# Altium PCB PCB4.PcbDoc
Units mil, origin at the board's own origin, x right, y up, seen from the top; angles counter-clockwise.
Board outline 2085 x 2170 mil, 2 copper layers (Top Layer, Bottom Layer); 62 components, 42 nets, 192 pads, 44 vias.
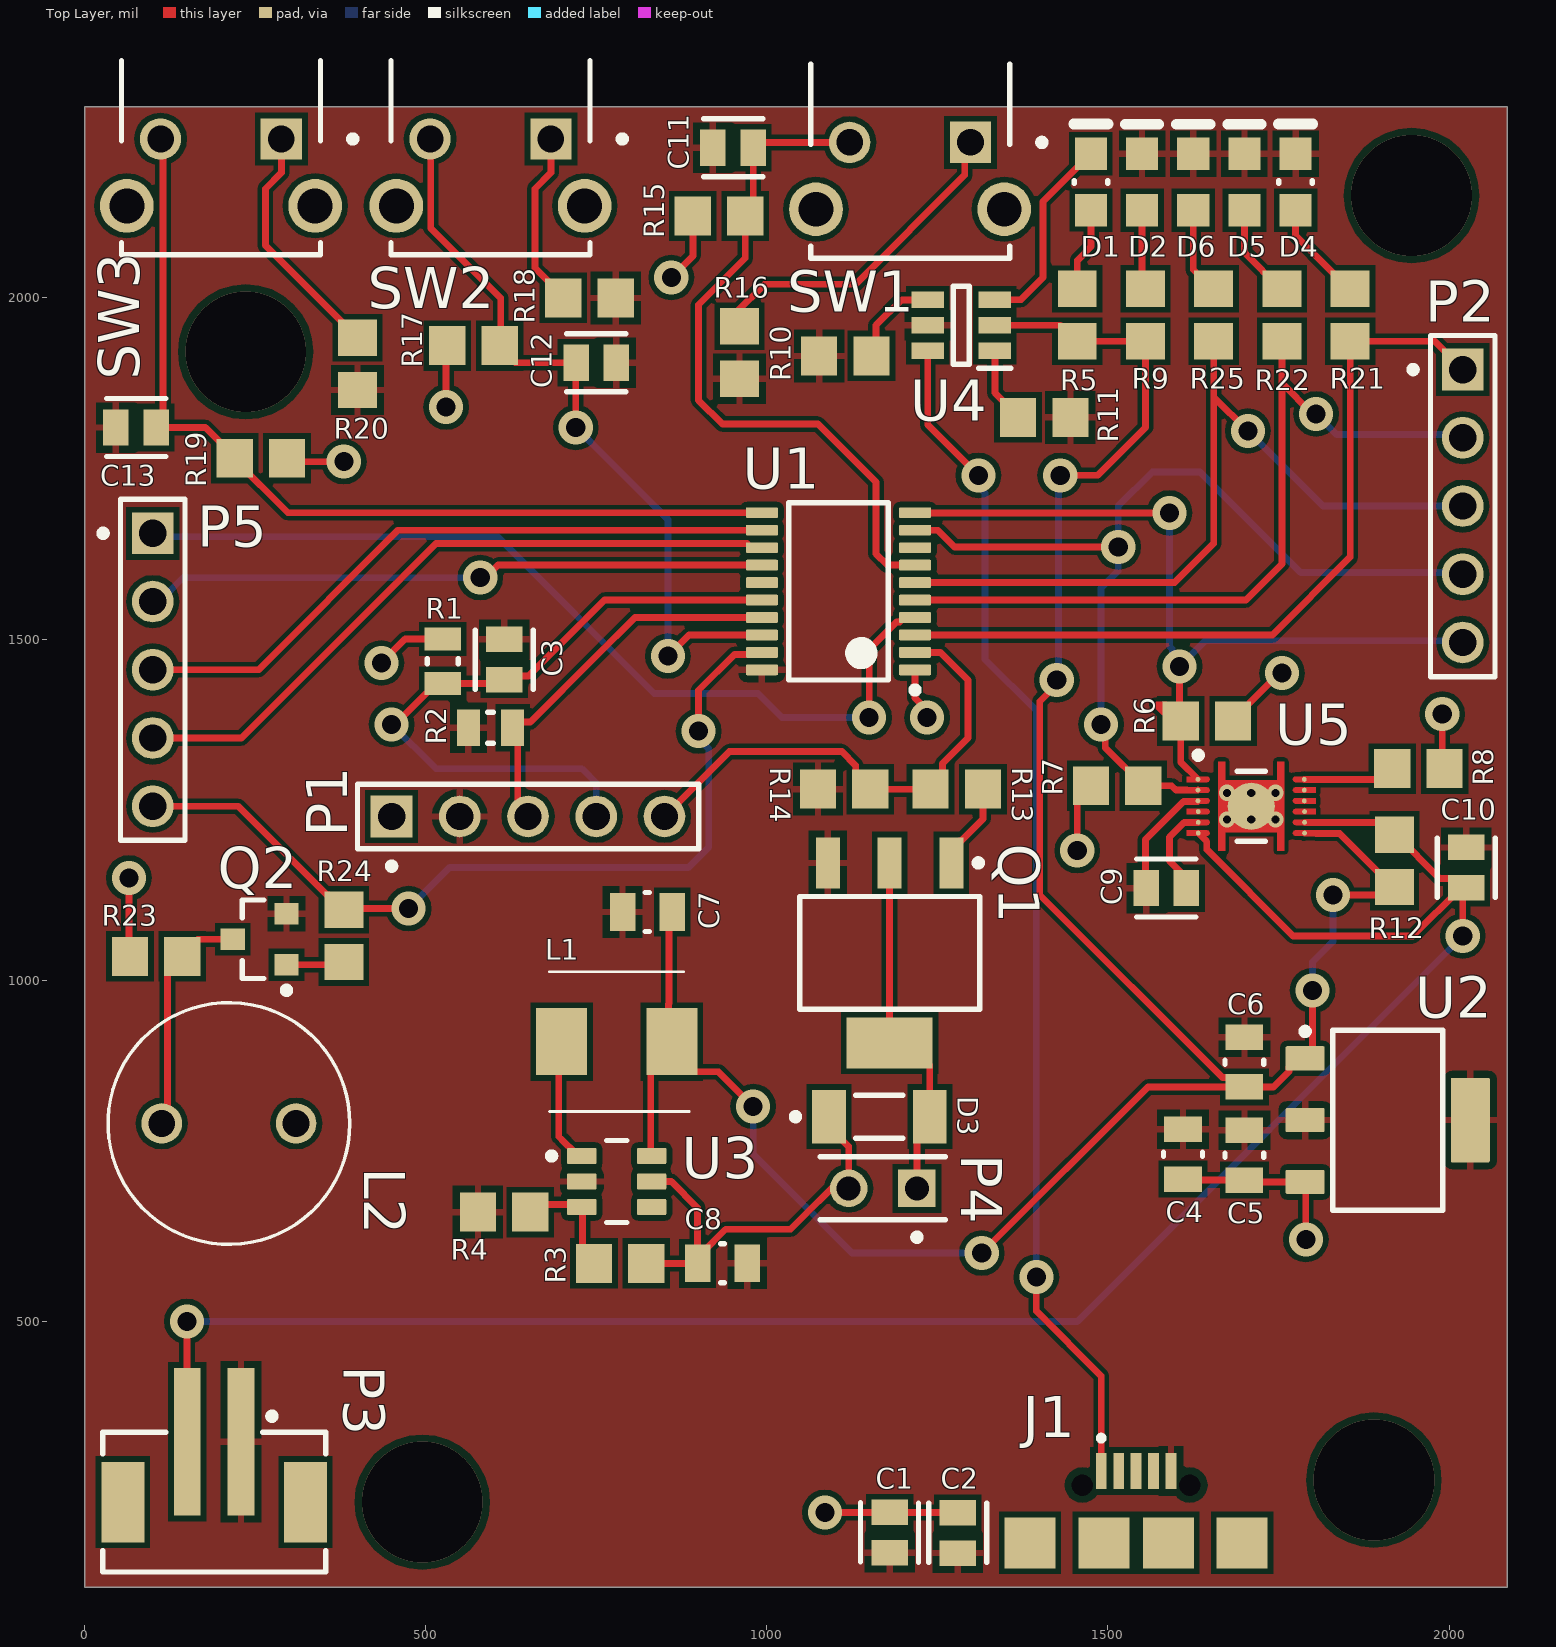
[diagram p0: Top Layer view]
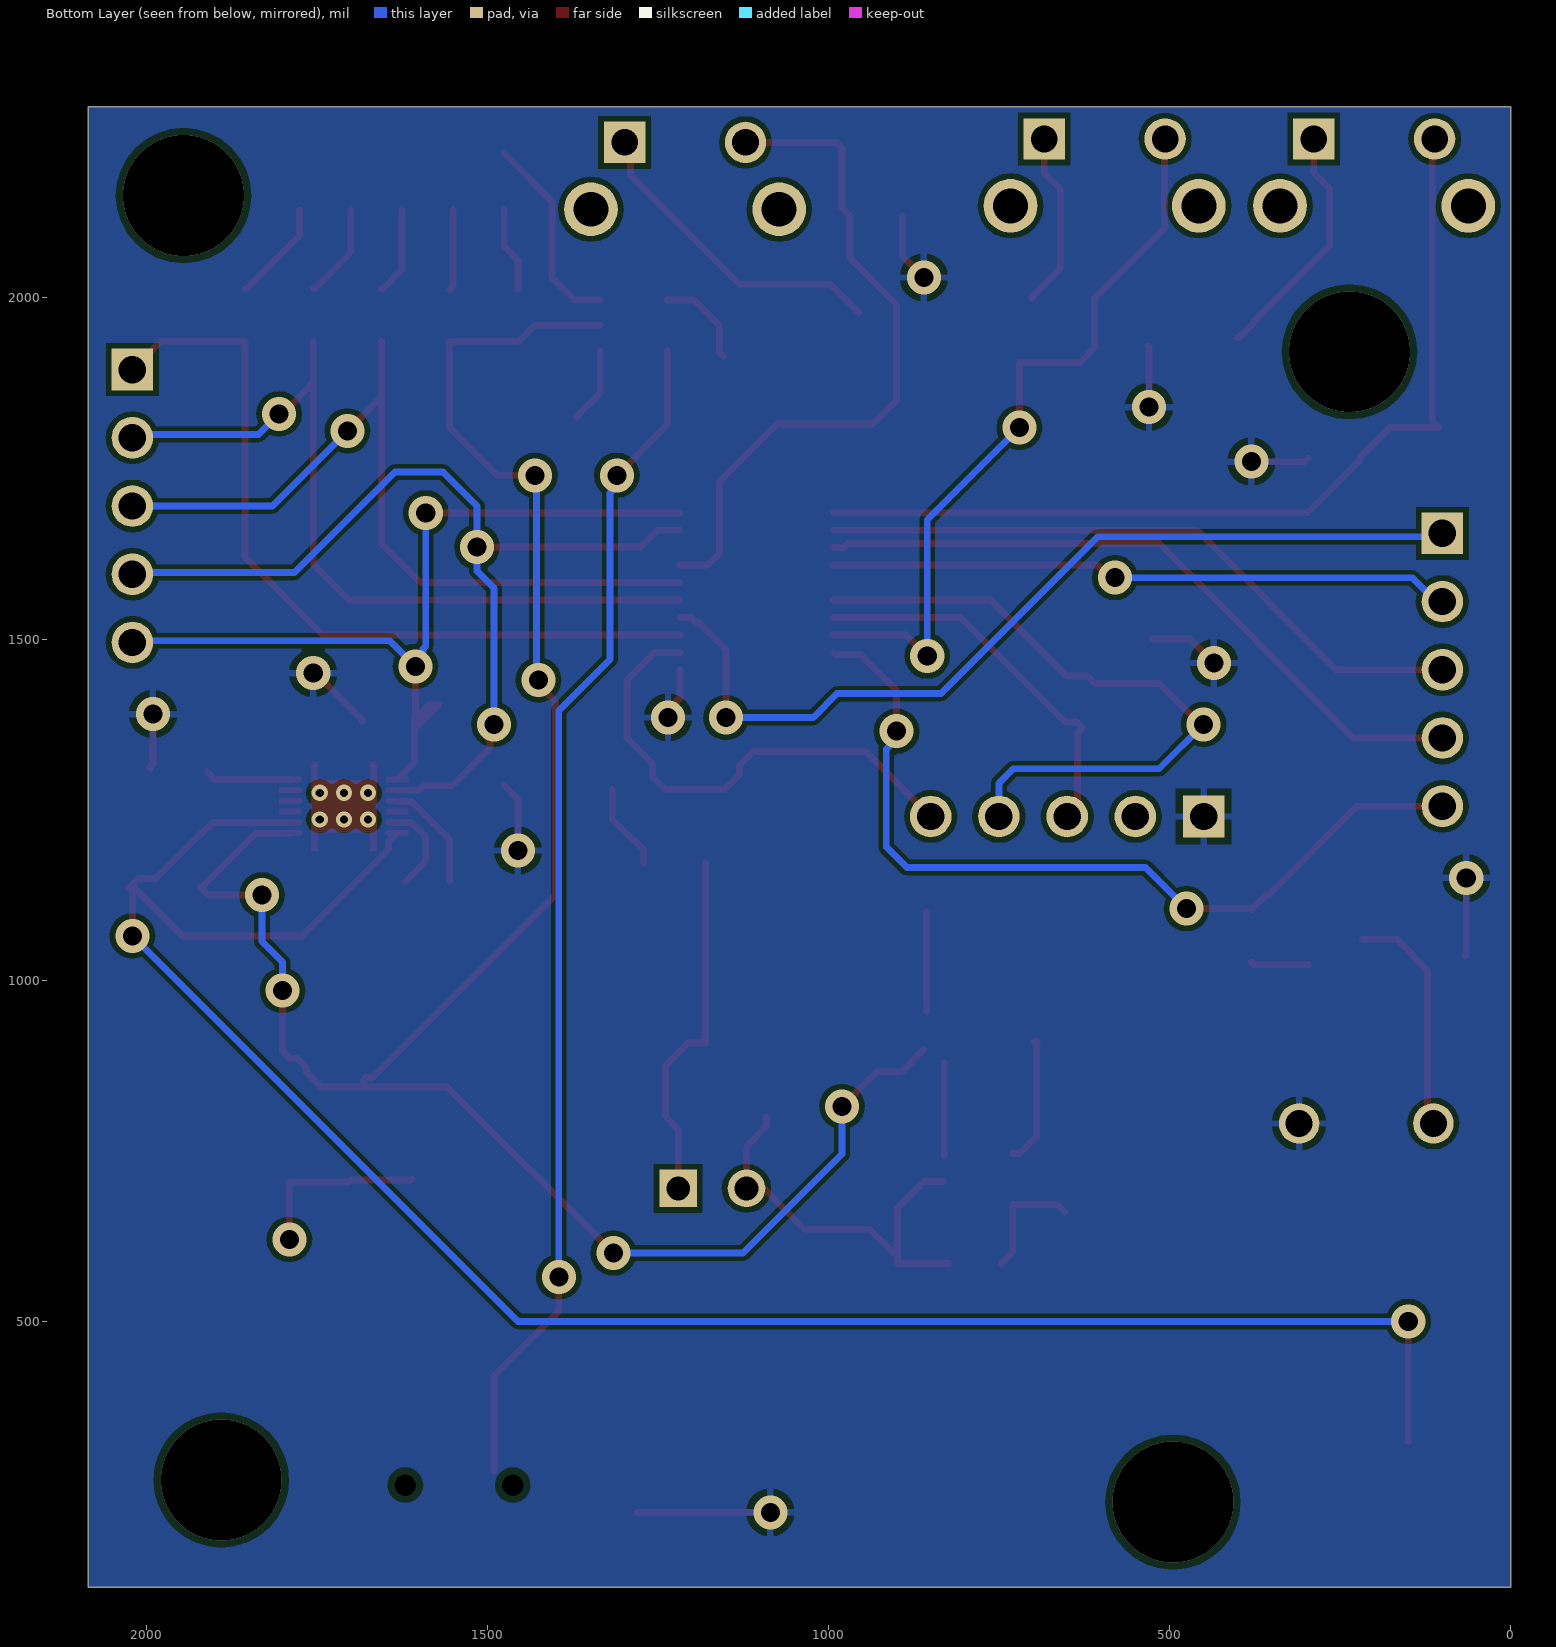
[diagram p1: Bottom Layer view, seen from below]
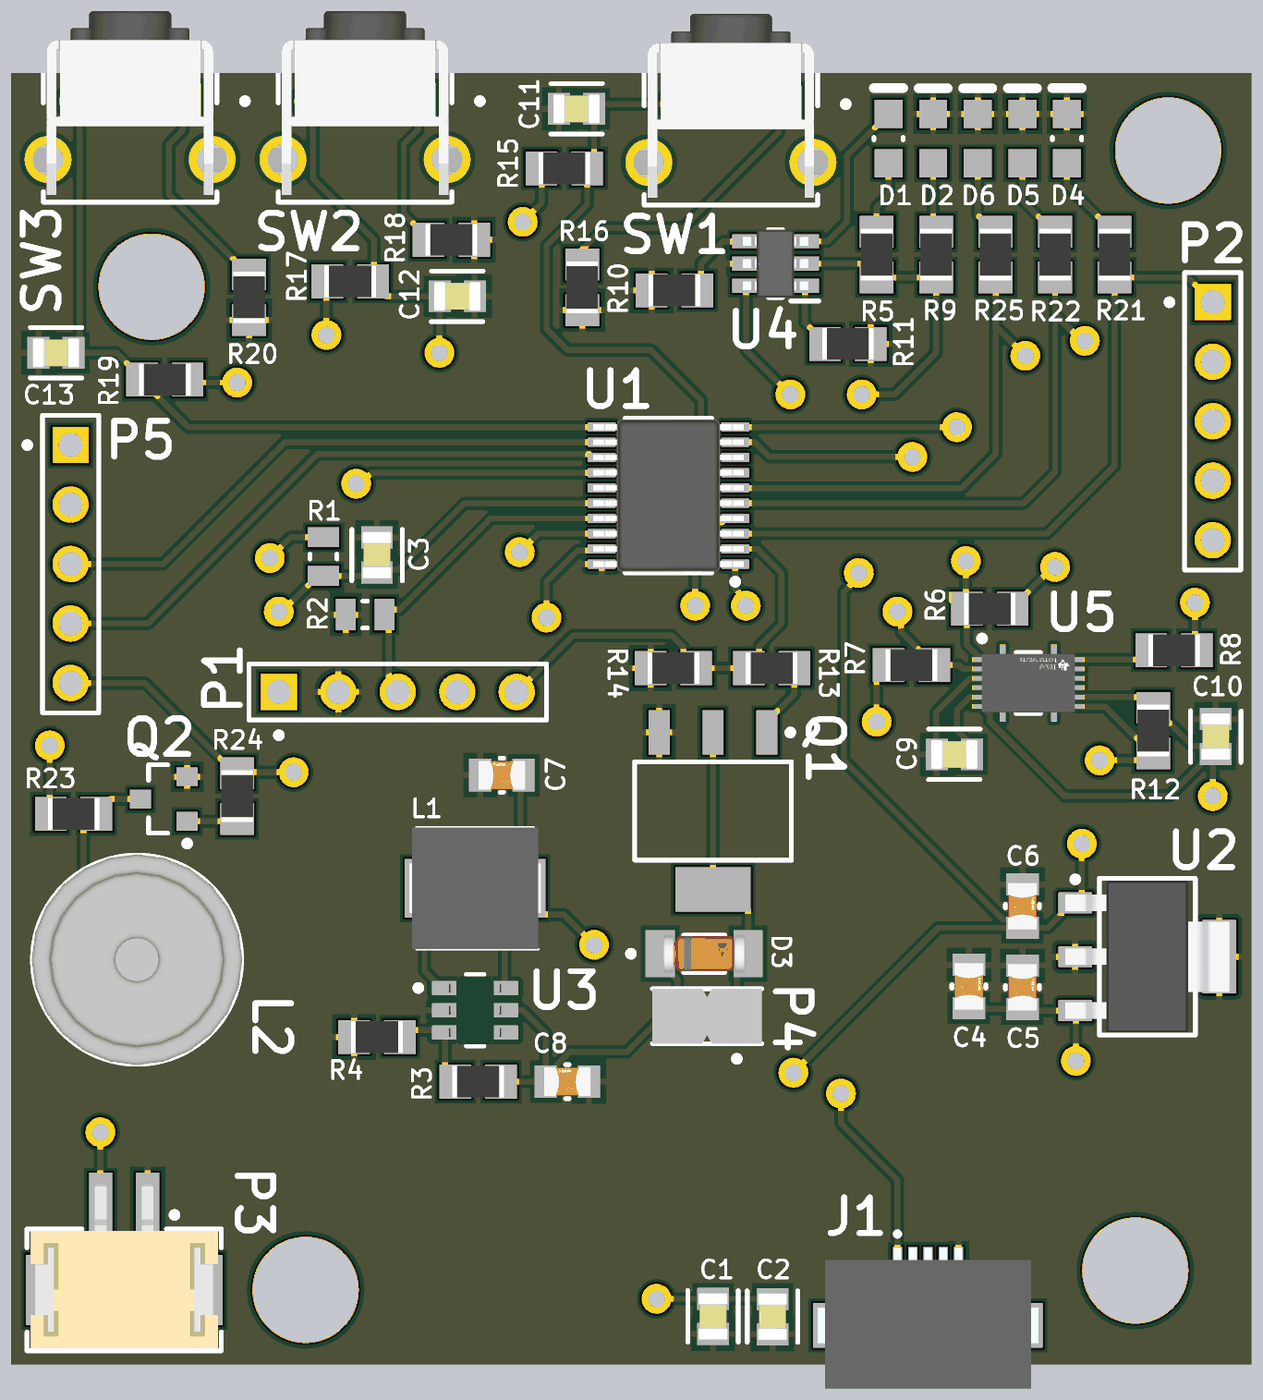
[diagram p2: 3D render of the assembled board from above, using the file's embedded part models]

## Layer stack, top to bottom
Top Solder: solder mask 0.4, Solder Resist, Dk 3.5
Top Layer: signal copper 1.4
Dielectric 1: dielectric 12.6, FR-4, Dk 4.8
Bottom Layer: signal copper 1.4
Bottom Solder: solder mask 0.4, Solder Resist, Dk 3.5

## Board outline
0,110 2085,110 2085,2280 0,2280

## Design rules (kind name [scope] priority, off if disabled: settings)
Clearance [All] p1: gap=8 ignorepadtopadclearanceinfootprint=FALSE except(6: Arc-Arc Arc-Track Arc-SMDPad Arc-THPad Arc-Fill Arc-Poly Arc-Region Track-Track Track-SMDPad Track-THPad Track-Fill Track-Poly Track-Region SMDPad-SMDPad SMDPad-THPad THPad-THPad Fill-Fill Fill-Poly Fill-Region Poly-Poly Poly-Region Region-Region; 10: Fill-Hole Poly-Hole Region-Hole)
PolygonConnect [All] p1: connectstyle=Relief reliefconductorwidth=10 reliefentries=4 polygonreliefangle="90 Angle" airgapwidth=10
RoutingVias [All] p1: holewidth=28 width=50 viastyle="Through Hole" minholewidth=28 minwidth=50 maxholewidth=28 maxwidth=50
SolderMaskExpansion [All] p1: expansion=4 istentingtop=FALSE
Width [All] p1: maxlimit=10 minlimit=10 preferedwidth=10
30 further rules are at their usual default settings.

## Classes and differential pairs
component class "Power Supply": C4 C5 C6 C7 C8 L1 R3 R4 U2
component class MotorControl: D3 P4 Q1 R13 R14
component class MCU: C1 C2 C3 C11 C12 C13 D4 D5 D6 L2 P1 P2 P5 Q2 R1 R2 R15 R16 R17 R18 R19 R20 R21 R22 R23 R24 R25 SW1 SW2 SW3 U1
component class BatteryControl: C9 C10 D1 D2 J1 P3 R5 R6 R7 R8 R9 R10 R11 R12 U4 U5

## Components (designator, comment, footprint, x,y, rotation, side; value= is the part's Value field where it differs from the comment)
C1 "10 uF" FP-C0805C-DG-MFG 1180,190.47 r270 top value=10uF
C2 "0.1 uF" FP-C0805C-DG-MFG 1280,190 r270 top value=10uF
C3 "1.1 nF" FP-C0805C-DG-MFG 615,1470 r90 top value=10uF
C4 "4.7uF" FP-CC0805-0_85-MFG 1610,745 r90 top value="100 nF"
C5 "470nF" FP-CC0805-0_85-MFG 1700,743.58 r90 top value="100 nF"
C6 "4.7uF" FP-CC0805-0_85-MFG 1700,880 r90 top value="100 nF"
C7 "1uF" FP-CC0805-0_85-MFG 825,1100 r180 top value="100 nF"
C8 "4.7uF" FP-CC0805-0_85-MFG 935,585 r180 top value="100 nF"
C9 "0.47 uF" FP-C0805C-DG-MFG 1585.47,1135 r180 top value=10uF
C10 "1 nF" FP-C0805C-DG-MFG 2025,1165 r90 top value=10uF
C11 "0.1uF" FP-C0805C-DG-MFG 950.47,2220 r180 top value=10uF
C12 "0.1uF" FP-C0805C-DG-MFG 750,1905 r0 top value=10uF
C13 "0.1uF" FP-C0805C-DG-MFG 75.47,1810 r180 top value=10uF
D1 "LTST-C170KRKT" LTST-C170KRKT_V 1475,2170 r90 top
D2 "HSMG-C170" AVAG-HSMX-C170_V 1550,2170 r90 top
D3 "LS4148-GS18" FP-6_560-5006_01-4-MFG 1165,800 r0 top value=4pF
D4 "LTST-C170KRKT" LTST-C170KRKT_V 1775,2170 r90 top
D5 "HSMG-C170" AVAG-HSMX-C170_V 1700,2170 r90 top
D6 "HSMG-C170" AVAG-HSMX-C170_V 1625,2170 r90 top
J1 "MICROQTJ" MICROQTJ 1541.26,200.94 r0 top
L1 "MWSA0503S-100MT" MWSA0503S4R7MT 780,910 r180 top
L2 "GMD0942YB" CPE-171-Footprint-1 211.61,790 r180 top
P1 "77311-462K05LF" FCI-77311-5_V 650,1240 r0 top
P2 "77311-462K05LF" FCI-77311-5_V 2020,1695 r270 top
P3 "620302124022" 620302124022 190,235 r0 top
P4 "5-146280-2" TECO-5-146280-2_V 1170,695 r180 top
P5 "77311-462K05LF" FCI-77311-5_V 100,1455 r270 top
Q1 "BSP296N" INF-PG-SOT223_SC-73_M 1180,1040 r270 top
Q2 "MMBTA06LT1G" ONSC-SOT-23-3-318-08_V 256.61,1060 r180 top
R1 "47k" RESC2013X50X30LL20T20 525,1467.48 r90 top
R2 "1k" RESC2013X50X30LL20T20 595,1370 r0 top
R3 "Resistor 1k +/-1% 0805 125 mW" RESC2013X70X40ML20T20 785,585 r0 top value=1M
R4 "Resistor 1k +/-1% 0805 125 mW" RESC2013X70X40ML20T20 615,660 r0 top value=71.5k
R5 "Resistor 1k +/-1% 0805 125 mW" RESC2013X70X40ML20T20 1455,1975 r270 top value=470
R6 "Resistor 1k +/-1% 0805 125 mW" RESC2013X70X40ML20T20 1645,1380 r0 top value=4.7k
R7 "Resistor 1k +/-1% 0805 125 mW" RESC2013X70X40ML20T20 1513.39,1285 r180 top value=4.7k
R8 "Resistor 1k +/-1% 0805 125 mW" RESC2013X70X40ML20T20 1955,1310 r0 top value=10k
R9 "Resistor 1k +/-1% 0805 125 mW" RESC2013X70X40ML20T20 1555,1975 r270 top value=470
R10 "Resistor 1k +/-1% 0805 125 mW" RESC2013X70X40ML20T20 1115,1915 r180 top value=10k
R11 "Resistor 1k +/-1% 0805 125 mW" RESC2013X70X40ML20T20 1406.61,1825 r0 top value=10k
R12 "Resistor 1k +/-1% 0805 125 mW" RESC2013X70X40ML20T20 1920,1175 r270 top value=0.01
R13 "Resistor 1k +/-1% 0805 125 mW" RESC2013X70X40ML20T20 1278.39,1280 r180 top value=220
R14 "Resistor 1k +/-1% 0805 125 mW" RESC2013X70X40ML20T20 1113.39,1280 r0 top value=10k
R15 "Resistor 1k +/-1% 0805 125 mW" RESC2013X70X40ML20T20 930,2120 r0 top value=10k
R16 "Resistor 1k +/-1% 0805 125 mW" RESC2013X70X40ML20T20 960,1920 r270 top value=1k
R17 "Resistor 1k +/-1% 0805 125 mW" RESC2013X70X40ML20T20 570,1930 r0 top value=10k
R18 "Resistor 1k +/-1% 0805 125 mW" RESC2013X70X40ML20T20 740,2000 r0 top value=1k
R19 "Resistor 1k +/-1% 0805 125 mW" RESC2013X70X40ML20T20 258.39,1765 r180 top value=10k
R20 "Resistor 1k +/-1% 0805 125 mW" RESC2013X70X40ML20T20 400,1903.39 r270 top value=1k
R21 "Resistor 1k +/-1% 0805 125 mW" RESC2013X70X40ML20T20 1855,1975 r270 top value=470
R22 "Resistor 1k +/-1% 0805 125 mW" RESC2013X70X40ML20T20 1755,1975 r270 top value=470
R23 "Resistor 1k +/-1% 0805 125 mW" RESC2013X70X40ML20T20 105,1035 r0 top value=1k
R24 "Resistor 1k +/-1% 0805 125 mW" RESC2013X70X40ML20T20 380,1065 r270 top value=1k
R25 "Resistor 1k +/-1% 0805 125 mW" RESC2013X70X40ML20T20 1655,1975 r270 top value=470
SW1 "1825027-5" FP-1825027-5-0 1210,2225 r180 top
SW2 "1825027-5" FP-1825027-5-0 595,2230 r180 top
SW3 "1825027-5" FP-1825027-5-0 200,2230 r180 top
U1 "MSP430G2553IPW20" PW0020A_L 1105,1570 r180 top
U2 "LM340MP-5.0/NOPB" DCY0004A_L 1910,795 r0 top
U3 "TLV61046ADBVT" FP-DBV0006A-MFG 780,705 r0 top
U4 "BQ21040DBVT" SOT95P280X145-6N 1285,1960 r180 top
U5 "BQ27441DRZR-G1A" FP-DRZ0012A-MFG 1710,1255 r270 top

## Footprints (in the part's own frame and the unit in brackets; to place one, negate y for a bottom-side part, rotate by r counter-clockwise, add the part's x,y. Pads: shape width x height; smd on the part's side, far side on the other; paste and mask are expansions set on the pad)
620302124022 [mm] "2.00mm SMT Male Vertical Shrouded Header, 2p"
  rect 1x5.5 smd: 1(1,2.25) 2(-1,2.25)
  rect 1.6x3 smd: MP1(-3.4,0) MP2(3.4,0)
  silkscreen extent -4.15,-2.6 4.15,3.32, body extent -4,-2.5 4,4.51, height 6.77
AVAG-HSMX-C170_V [mm] "SMD, 2-Leads, Body 2x1.25mm, Height 0.8mm"
  rect 1.2x1.2 smd: 1(-1.05,0) 2(1.05,0)
  silkscreen extent 2.15,-0.63 2.15,0.63, body extent -1,-0.63 1,0.63, height 0.8
CPE-171-Footprint-1 [mm]
  round 1.508 hole 1: 1(-2.5,0) 2(2.5,0)
  silkscreen extent -4.5,-4.5 4.5,4.5, body extent -4.5,-4.5 4.5,4.5, height 8.01
DCY0004A_L [mm] "SOT223, 4-Leads, Body 6.7x3.7mm, Pitch 2.3mm, IPC High Density"
  rrect11% 1.45x0.9 smd: 1(-3.075,2.3) 2(-3.075,0) 3(-3.075,-2.3)
  rrect7% 1.45x3.15 smd: 4(3.075,0)
  silkscreen extent -3.2,-3.35 2.05,3.42, body extent -3.5,-3.25 3.5,3.25, height 1.62
FCI-77311-5_V [mm] "THD, 5-Leads, Body 12.7x2.4mm, Pitch 2.54mm"
  rect 1.55x1.55 hole 1.02: 1(-5.08,0)
  round 1.55 hole 1.02: 2(-2.54,0) 3(0,0) 4(2.54,0) 5(5.08,0)
  silkscreen extent -6.35,-1.97 6.35,1.2, body extent -6.35,-1.2 6.35,1.2, height 16.24
FP-6_560-5006_01-4-MFG [mm]
  rect 1.25x2 smd paste+0 mask+0: 1(-1.875,0) 2(1.875,0)
  silkscreen extent -3.25,-0.8 0.87,0.8, body extent -2.6,-1.1 2.6,1.1, height 0.25
FP-1825027-5-0 [mm]
  rect 1.54x1.54 hole 0.99 paste-1000 mask+0: 1(-2.25,-0.075)
  round 1.54 hole 0.99 paste-1000 mask+0: 2(2.25,-0.075)
  round 2 hole 1.3 paste-1000 mask+0: 3(-3.505,2.415) 4(3.505,2.415)
  silkscreen extent -5.03,-3 3.7,4.23, body extent -4.6,-4.34 4.6,4.33, height 0.25
FP-C0805C-DG-MFG [mm]
  rect 0.95x1.35 smd paste+0 mask+0: 1(-0.75,0) 2(0.75,0)
  silkscreen extent -1.11,-1.08 1.1,1.07, body extent -1.4,-0.85 1.4,0.85, height 0.25
FP-CC0805-0_85-MFG [mm]
  rect 0.95x1.4 smd paste+0 mask+0: 1(-0.925,0) 2(0.925,0)
  silkscreen extent -0.08,-0.72 0.08,0.72, body extent -1.6,-1.05 1.6,1.05, height 0.25
FP-DBV0006A-MFG [mm]
  rrect17% 1.1x0.6 smd paste+0 mask+0: 1(-1.3,0.95) 2(-1.3,0) 3(-1.3,-0.95) 4(1.3,-0.95) 5(1.3,0) 6(1.3,0.95)
  silkscreen extent -2.55,-1.53 0.38,1.53, body extent -1.95,-1.78 1.95,1.78, height 0.25
FP-DRZ0012A-MFG [mm]
  round 0.18 smd paste-1000 mask+0: 1(-1,-1.985) 2(-0.6,-1.985) 3(-0.2,-1.985) 4(0.2,-1.975) 5(0.6,-1.975) 6(1,-1.975) 7(1,1.985) 8(0.6,1.985) 9(0.2,1.985) 10(-0.2,1.975) 11(-0.6,1.975) 12(-1,1.975)
  round 1.755 smd paste-1000 mask+0: 13(0,0)
  Top Layer region: -1.65,1.225 1.65,1.225 1.65,0.975 0.975,0.975 0.975,-0.975 1.65,-0.975 1.65,-1.225 -1.65,-1.225 -1.65,-0.975 -0.975,-0.975 -0.975,0.975 -1.65,0.975 -1.65,1.225
  Top Layer region: -0.9,2.4 -0.9,1.65 -0.913,1.6 -0.95,1.563 -1,1.55 -1,1.55 -1.038,1.558 -1.071,1.579 -1.092,1.612 -1.1,1.65 -1.1,1.65 -1.1,2.4
  Top Layer region: -0.5,2.4 -0.5,1.65 -0.513,1.6 -0.55,1.563 -0.6,1.55 -0.6,1.55 -0.638,1.558 -0.671,1.579 -0.692,1.612 -0.7,1.65 -0.7,1.65 -0.7,2.4
  Top Layer region: -0.1,2.4 -0.1,1.65 -0.113,1.6 -0.15,1.563 -0.2,1.55 -0.2,1.55 -0.238,1.558 -0.271,1.579 -0.292,1.612 -0.3,1.65 -0.3,1.65 -0.3,2.4
  Top Layer region: 0.3,2.4 0.3,1.65 0.287,1.6 0.25,1.563 0.2,1.55 0.2,1.55 0.162,1.558 0.129,1.579 0.108,1.612 0.1,1.65 0.1,1.65 0.1,2.4
  Top Layer region: 0.7,2.4 0.7,1.65 0.687,1.6 0.65,1.563 0.6,1.55 0.6,1.55 0.562,1.558 0.529,1.579 0.508,1.612 0.5,1.65 0.5,1.65 0.5,2.4
  Top Layer region: 1.1,2.4 1.1,1.65 1.087,1.6 1.05,1.563 1,1.55 1,1.55 0.962,1.558 0.929,1.579 0.908,1.612 0.9,1.65 0.9,1.65 0.9,2.4
  Top Layer region: 0.9,-2.4 0.9,-1.65 0.908,-1.612 0.929,-1.579 0.962,-1.558 1,-1.55 1,-1.55 1.038,-1.558 1.071,-1.579 1.092,-1.612 1.1,-1.65 1.1,-1.65 1.1,-2.4
  Top Layer region: 0.5,-2.4 0.5,-1.65 0.508,-1.612 0.529,-1.579 0.562,-1.558 0.6,-1.55 0.6,-1.55 0.638,-1.558 0.671,-1.579 0.692,-1.612 0.7,-1.65 0.7,-1.65 0.7,-2.4
  Top Layer region: 0.1,-2.4 0.1,-1.65 0.108,-1.612 0.129,-1.579 0.162,-1.558 0.2,-1.55 0.2,-1.55 0.238,-1.558 0.271,-1.579 0.292,-1.612 0.3,-1.65 0.3,-1.65 0.3,-2.4
  Top Layer region: -0.3,-2.4 -0.3,-1.65 -0.292,-1.612 -0.271,-1.579 -0.238,-1.558 -0.2,-1.55 -0.2,-1.55 -0.162,-1.558 -0.129,-1.579 -0.108,-1.612 -0.1,-1.65 -0.1,-1.65 -0.1,-2.4
  Top Layer region: -0.7,-2.4 -0.7,-1.65 -0.692,-1.612 -0.671,-1.579 -0.638,-1.558 -0.6,-1.55 -0.6,-1.55 -0.562,-1.558 -0.529,-1.579 -0.508,-1.612 -0.5,-1.65 -0.5,-1.65 -0.5,-2.4
  Top Layer region: -1.1,-2.4 -1.1,-1.65 -1.092,-1.612 -1.071,-1.579 -1.038,-1.558 -1,-1.55 -1,-1.55 -0.962,-1.558 -0.929,-1.579 -0.908,-1.612 -0.9,-1.65 -0.9,-1.65 -0.9,-2.4
  silkscreen extent -2.02,-2.1 1.3,0.53, body extent -1.75,-2.5 1.75,2.5, height 0.25
INF-PG-SOT223_SC-73_M [mm] "SOT223, 4-Leads, Body 6.5x3.5mm, Pitch 2.3mm, IPC Low Density"
  rect 1.9x0.9 smd: 1(-3.35,2.3) 2(-3.35,0) 3(-3.35,-2.3)
  rect 1.9x3.2 smd: 4(3.35,0)
  silkscreen extent -3.47,-3.35 2.1,3.43, body extent -1.85,-3.35 1.85,3.35, height 1.8
LTST-C170KRKT_V [mm] "SMD, 2-Leads, Body 2x1.25mm"
  rect 1.2x1.2 smd: 1(-1.05,0) 2(1.05,0)
  silkscreen extent -0.05,-0.63 2.16,0.64, body extent -1,-0.63 1,0.63, height 1.2
MICROQTJ [mm]
  rect 0.4x1.35 smd: 1(-1.3,2.025) 2(-0.65,2.025) 3(0,2.025) 4(0.65,2.025) 5(1.3,2.025)
  round 0.4 hole 0.8 unplated: MH1(-2,1.5) MH2(2,1.5)
  rect 1.9x1.9 smd: MP1(-3.95,-0.65) MP2(3.95,-0.65) MP3(-1.2,-0.65) MP4(1.2,-0.65)
  silkscreen extent -1.4,3.15 -1.2,3.35, body extent -4.71,-3.35 4.71,2.66, height 2.03
MWSA0503S4R7MT [mm]
  rect 1.9x2.5 smd: 1(-2.05,0) 2(2.05,0)
  silkscreen extent -2.7,-2.6 2.5,2.6, body extent -2.81,-2.6 2.81,2.6, height 3.1
ONSC-SOT-23-3-318-08_V [mm] "SOT23, 3-Leads, Body 2.92x1.3mm, Pitch 0.95mm"
  rect 0.9x0.8 smd: 1(-1,0.95) 2(-1,-0.95) 3(1,0)
  silkscreen extent -1.13,-1.46 0.65,2.02, body extent -0.65,-1.46 0.65,1.46, height 1.11
PW0020A_L [mm] "SOP, 20-Leads, Body 6.6x4.5mm, Pitch 0.65mm, IPC High Density"
  rrect25% 1.2x0.4 smd: 1(-2.85,2.925) 2(-2.85,2.275) 3(-2.85,1.625) 4(-2.85,0.975) 5(-2.85,0.325) 6(-2.85,-0.325) 7(-2.85,-0.975) 8(-2.85,-1.625) 9(-2.85,-2.275) 10(-2.85,-2.925) 11(2.85,-2.925) 12(2.85,-2.275) 13(2.85,-1.625) 14(2.85,-0.975) 15(2.85,-0.325) 16(2.85,0.325) 17(2.85,0.975) 18(2.85,1.625) 19(2.85,2.275) 20(2.85,2.925)
  silkscreen extent -2.98,-3.3 1.85,3.8, body extent -3.21,-3.25 3.21,3.25, height 1
RESC2013X50X30LL20T20 [mm] "Chip Resistor, 2-Leads, Body 2.00x1.25mm, IPC High Density"
  rect 0.85x1.35 smd: 1(-0.825,0) 2(0.825,0)
  silkscreen extent -0.1,-0.58 0.1,0.58, body extent -1.1,-0.72 1.1,0.72, height 0.5
RESC2013X70X40ML20T20 [mm] "Chip Resistor, 2-Leads, Body 2.2x1.35mm, IPC Low Density"
  rect 1.35x1.45 smd: 1(-0.975,0) 2(0.975,0)
  body extent -1.1,-0.67 1.1,0.67, height 0.7
SOT95P280X145-6N [mm]
  rect 1.2x0.6 smd: 1(-1.25,0.95) 2(-1.25,0) 3(-1.25,-0.95) 4(1.25,-0.95) 5(1.25,0) 6(1.25,0.95)
  silkscreen extent -1.85,-1.45 0.3,1.6, body extent -1.4,-1.45 1.4,1.45, height 1.45
TECO-5-146280-2_V [mm] "Connector, 2-Leads, Body 4.67x2.34mm, Pitch 2.54mm"
  rect 1.4x1.4 hole 0.89: 1(-1.27,0)
  round 1.4 hole 0.89: 2(1.27,0)
  silkscreen extent -2.33,-1.17 2.33,1.94, body extent -2.34,-1.17 2.34,1.17, height 5.33

## Part data
C1 C2 C3 C9 C10 C11 C12 C13: library part CMP-2007-03243-2, "CAP CER 10UF 10V X5R 0805", 3DS Part Number=220-00001, Capacitance=10uF, Manufacturer=Kemet, Manufacturer Part Number=C0805C106K8PACTU, Package=C0805C-DG, Temperature="-55°C to +85°C", Temperature Characteristic=X5R, Temperature Coefficient=15%, Temperature Range High=+85°C, Temperature Range Low=-55°C, Tolerance=10%, Voltage=10V, Automotive=No, Category=Cap, ComponentLink2Description=Datasheet, ComponentLink2URL=https://content.kemet.com/datasheets/KEM_C1006_X5R_SMD.pdf, Device Class L1="Passive Components", Device Class L2=Capacitors, Device Class L3="Ceramic Capacitors", Digikey Description="CAP CER 10UF 10V X5R 0805", Height=1.4mm, Ipc Land Pattern Name=CAPC200125X125, Lead Free=Yes, Material=Ceramic, Mouser Description="CAP CER 10UF 10V X5R 0805", Octopart=https://octopart.com/c0805c106k8pactu-kemet-98697, RoHS=TRUE, Voltage Rating=10V
C4 C5 C6 C7 C8: library part CMP-03422-000499-1, "CAP CER 0.1UF 50V X7R 0805", Capacitance="100 nF", Manufacturer=Yageo, Manufacturer Part Number=CC0805KRX7R9BB104, Package=CC0805-0.85, Temperature="-30°C to +85°C", Temperature Characteristic=X7R, Temperature Range High=+85°C, Temperature Range Low=-30°C, Tolerance=0.1, Voltage Rating="50 V", Automotive=No, Category=Cap, ComponentLink2Description=Datasheet, ComponentLink2URL=http://www.yageo.com/documents/recent/UPY-GPHC_Y5V_6.3V-to-50V_8.pdf, Device Class L1="Passive Components", Device Class L2=Capacitors, Device Class L3="Ceramic Capacitors", Digikey Description="CAP CER 0.1UF 50V X7R 0805", Footprint Url=http://www.yageo.com/exep/pages/download/literatures/UPY-C_GEN_24.pdf, Height=0.95mm, Ipc Land Pattern Name=CAPC200125X85, Lead Free=Yes, Material=Ceramic, Mouser Description="Multilayer Ceramic Capacitors MLCC - SMD/SMT 100nF 50V X7R 10%", Octopart=https://octopart.com/cc0805krx7r9bb104-yageo-192993, RoHS=TRUE
D1 D4: library part CMP-2000-07593-1, "LED Red, 75 mW, 54 mcd, -55 to 85 degC, 2-Pin SMD, RoHS, Tape and Reel / LCSC Part # C94868", Case Code (Imperial)=0805, Case Code (Metric)=2012, Colour=Red, Forward Current=30mA, Forward Voltage=2V, Lens Colour=Colorless, Manufacturer=Lite-On, Max Operating Temperature=85degC, Min Operating Temperature=-55degC, Package Description="2-Pin Surface Mount Device, Body 2 x 1.25 mm", Package Quantity=1, Package Reference=C170KRKT, Power Dissipation=75mW, Test Current=20mA, Case\/Package=0805, Datasheet URL=http://optoelectronics.liteon.com/upload/download/DS-22-99-0150/LTST-C170KRKT.pdf, Datasheet Version="Rev. D, 11/2014", Depth=1.6mm, Dominant Wavelength=631nm, Height=1.1mm, Illumination Colour=Red, Lead Free=LeadFree, Length=3.2mm, Lens Style=Rectangular, Lens Transparency=Clear, Luminous Intensity=54mcd, Manufacturer URL=http://www.us.liteon.com/, Mount=SurfaceMount, Mounting Technology=SurfaceMount, Number of Elements=1, Number of LEDs=1, Number of Pins=2, Packaging=TapeandReel, Power Rating=75mW, Radiation Hardening=No, RoHSCompliant=True, Viewing Angle=130degrees, Wavelength=639nm, Width=1.25mm
D2 D5 D6: library part CMP-2000-05062-1, "Chip LED, Green, 2.2 V, -40 to 85 degC, 2-Pin SMD, Pb-Free, Tape and Reel / LCSC Part # C188728", Forward Current If=20mA, Forward Voltage=2.2V, Forward Voltage VF Max=2.6V, LED Colour=Green, Manufacturer=Avago, Operating Temperature Max=85degC, Operating Temperature Min=-30degC, Operating Temperature Range=-30degCto+85degC, Opto Case Style=SMD, Package Description="2-Pin Surface Mount Device, Body 2 x 1.25 mm, Height 0.8 mm", Package Reference=HSMX-C170, Storage Temperature Min=-40degC, Bulb Size=1.25mmx1.4mm, Datasheet URL=https://datasheet.ciiva.com/29280/180495-da-01-en-chip-led-hsmg-c170-gelb-gruen-29280971.pdf, Datasheet Version=Oct-08, Dominant Wavelength=572nm, Dominant Wavelength Typ=572nm, External Depth=0.8mm, External Length / Height=2mm, External Width=1.25mm, Forward Current If Max=20mA, LED Mounting=SMD, LED Type=Standard, Lens Shape=Rectangular, Light Area Height=1mm, Luminous Intensity=15mcd, Luminous Intensity Min=4mcd, Luminous Intensity Typ=15mcd, Manufacturer URL=http://www.avagotech.com/, Mounting Type=SMD, MSL=MSL2A-4weeks, No. of Pins=2, Opto Mounting Orientation=Top, Packaging=CutTape, Peak Forward Current=20mA, Peak Wavelength=570nm, PIV Max=5V, Storage Temperature Max=85degC, SVHC=NoSVHC(16-Jun-2014), Viewing Angle=170deg, Voltage Vf Typ=2.2V, Wavelength Typ=570nm
D3: library part CMP-02539-000014-1, "DIODE GEN PURP 75V 150MA SOD80 /  LCSC Part # C145227", Capacitance=4pF, Forward Current=300mA, Manufacturer=Vishay, Max Junction Temp=+175°C, Max Repetitive Reverse Voltage=100V, Max Surge Forward Current=2A, Package=6.560-5006.01-4, Peak Reverse Current=5uA, Reverse Voltage=75V, Temperature="to +175°C", Automotive=Yes, Automotive Grade="Grade 0", Category=Diode, ComponentLink2Description=Datasheet, ComponentLink2URL=http://www.vishay.com/docs/85561/ls4148.pdf, Device Class L1="Discrete Semiconductors", Device Class L2=Diodes, Device Class L3="Schottky Diodes", Digikey Description="DIODE GEN PURP 75V 150MA SOD80", Height=1.7mm, Lead Free=Yes, Manufacturer Part Number=LS4148-GS18, Mouser Description="In a Pack of 100, Vishay Switching Diode, 300mA 75V, 2-Pin SOD-80 LS4148-GS18", Octopart=https://octopart.com/ls4148-gs18-vishay-55507867, RoHS=TRUE, Temperature Range High=+175°C
J1: "Connector / LCSC Part # C404968", Manufacturer_Name="Shou Han", Datasheet Link=https://datasheet.lcsc.com/szlcsc/1908151409_SHOU-HAN-MicroQTJ_C404968.pdf, Height=1.93mm, Manufacturer_Part_Number=MICROQTJ
L1: library part MWSA0503S-4R7MT, "Inductor / MWSA0503S-100MT / LCSC Part # C408412 /  / PackageSMD-5.2x5.4x2.8 / MWSA0503S-4R7MT / Manufacturer Sunlord /  / Actual part is MWSA0503S-100MT but using the footpring and 3D CAD from this one (MWSA0503S-4R7MT) bc they have the same footprint", Manufacturer_Name=SUNLORD, Datasheet Link=https://datasheet.lcsc.com/szlcsc/1908262302_Sunlord-MWSA0503S-4R7MT_C408410.pdf, Height=3mm, Manufacturer_Part_Number=MWSA0503S-4R7MT
L2: library part CMP-001-0014-1, "CPE-171 (actual footpring) / Buzzers Transducer, Externally Driven Piezo 3V 4kHz 75dB @ 3V, 10cm Through Hole PC Pins /  / GMD0942YB (using this one from JLC so that JLC solders it for us). This buzzer is manufactured by INGHAI electronics.  / datasheet: https://datasheet.lcsc.com/szlcsc/2001132233_INGHAi-GMD0942YB-3V2700_C252932.pdf"
P1 P2 P5: library part CMP-1698-00006-1, "Male Header, Pitch 2.54 mm, 1 x 5 Position, Height 16.24 mm, Tail Length 3.05 mm,  / -65 to 125 degC, RoHS, Tape and Reel / WON'T BE POPULATED BY MANUFACTURER", Current Rating="1 A", Max Operating Temperature=85degC, Min Operating Temperature=-25degC, Package Quantity=500, ComponentLink1Description="Manufacturer URL", ComponentLink1URL=http://portal.fciconnect.com/, ComponentLink2Description=Datasheet, ComponentLink2URL=http://portal.fciconnect.com/Comergent//fci/drawing/77311.pdf, Contact Material=Brass, DatasheetVersion="Rev. CK, 07/2016", Gender=Female, PackageDescription="Male Header, Pitch 2.54 mm, 1 x 5 Position, Height 16.24 mm, Tail Length 3.05 mm", PackageReference=77311-5, Packaging="Tape and Reel", RoHSCompliant=True, Shielding=Shielded
P3: library part CMP-1502-00660-1, "Male Shrouded Header WR-WTB, SMT, Vertical, pitch 2 mm, 1 x 2 position / WON'T BE POPULATED BY MANUFACTURER", Contact Resistance=20mOhm, Manufacturer="Wurth Elektronik", Operating Temperature=-25to85degC, Working Voltage=100VAC, Datasheet URL=https://katalog.we-online.de/em/datasheet/6203xx124022.pdf, Gender=Male, Manufacturer URL=http://www.we-online.de, Mounting Technology=SMT, Orientation=Vertical, Package Reference=620302124022, Packaging=TapeandReel, Part Number=620302124022, Pitch=2mm, Position=1x2, Publisher=WurthElektronik
P4: library part CMP-2000-07492-1, "Male Header, Pitch 2.54 mm, 1 x 2 Position, Height 8.21 mm, Tail Length 3.05 mm, -65 to 105 degC, RoHS, Bulk / WON'T BE POPULATED BY MANUFACTURER", Case\/Package=100, Colour=Black, Current Rating=3A, Flammability Rating=UL94V-0, High Temperature Housing=Yes, Manufacturer="TE Connectivity", Max Current Rating=5A, Max Operating Temperature=105degC, Min Operating Temperature=-65degC, Package Description="Male Header, Pitch 2.54 mm, 1 x 2 Position, Height 8.21 mm, Tail Length 3.05 mm", Package Quantity=500, Approvals=CSA, Board Standoff=No(Without), Connector Type=Header, Contact Gender=Male, Contact Material=CopperAlloy, Contact Mating Length=0.23inch, Contact Plating=Matte, Contact Protection=No(Without), Contact Shape=Square, Datasheet URL=http://www.te.com/commerce/DocumentDelivery/DDEController?Action=showdoc&DocId=Customer+Drawing%7F146280%7FH1%7Fpdf%7FEnglish%7FENG_CD_146280_H1.pdf%7F5-146280-2, Datasheet Version="Rev. H1, 08/2016", Depth=2.34mm, Gasket=No(Without), High Speed Serial Data Connector=No, Housing Colour=Black, Housing Material=Polymer, Keyed=No, Length=4.67mm, Manufacturer URL=http://www.te.com/, Mating Alignment=No(Without), Mating Connector Lock=No(Without), Mating Post Length=0.23inch, Mount=ThroughHole, Mounting Technology=ThroughHole, Number of Contacts=2, Number of Positions=2, Number of Rows=1, Orientation=Straight, Package Reference=5-146280-2, Packaging=Carton, Panel Mount Retention=No(Without), PCB Mount Retention=Without, PCB Mounting Orientation=Vertical, PCB Thickness=0.063inch, Pitch=2.54mm, Radiation Hardening=No, RoHSCompliant=true, Row Spacing=2.54mm, Selectively Loaded=No(Without), Stabilizers=No(Without), Termination=ThroughHole, Termination Post Length=0.12inch
Q1: library part CMP-1149-00010-1, "N-Channel SIPMOS Small-Signal-Transistor, 240 V VDS, 0.35 A ID, -55 to 150 degC, PG-SOT223 (SC-73), Reel, Green / LCSC Part # C135807", Manufacturer=Infineon, PartNumber=BSP89, ComponentLink1Description="Manufacturer URL", ComponentLink1URL=http://www.infineon.com/, ComponentLink2Description=Datasheet, ComponentLink2URL=http://www.infineon.com/dgdl/BSP89_Rev2.2.pdf?folderId=db3a3043156fd573011622e10b5c1f67&fileId=db3a30433b47825b013b4b8a07f90d55, ComponentLink3Description="Package Specification", ComponentLink3URL=http://www.infineon.com/dgdl/SOT223-Package_Overview.pdf?folderId=db3a30431936bc4b0119530470b03c3d&fileId=db3a30431936bc4b0119531d40b93c5c, DatasheetVersion="Rev. 2.2", Green=TRUE, Halogen-free=TRUE, ID (max)="0.35Â A", IDpuls (max)="1.4Â A", Mode=Enhancement, Mounting Technology="Surface Mount", PackageDescription="4-Pin Small Outline Transistor Package, 6.5 x 3.5 mm Body, 2.3 mm Pitch", PackageReference="PG-SOT223 (SC-73)", PackageVersion=Apr-08, Packing=Reel, Polarity=N, Ptot (max)="1.8Â W", QG="4.3Â nC", RDS (on) (max)="6,000 mOhm", RDS (on) (max) (@4.5V)="7,500 mOhm", RthJA (max)="115 K/W", VDS (max)="240 V", VGS(th) (max)="1.8Â V", VGS(th) (min)="0.8Â V"
Q2: library part CMP-1048-00619-1, "Driver Transistor, NPN Silicon, 3-Pin SOT-23, Pb-Free, Tape and Reel / LCSC Part # C77760", Manufacturer="On Semiconductor", ComponentLink1Description="Manufacturer URL", ComponentLink1URL=http://www.onsemi.com/, ComponentLink2Description=Datasheet, ComponentLink2URL=http://www.onsemi.cn/pub_link/Collateral/MMBTA05LT1-D.PDF, ComponentLink3Description="Package Specification", ComponentLink3URL=http://www.onsemi.cn/pub_link/Collateral/318-08.PDF, DatasheetVersion="Rev. 8", fT Min (MHz)=100, IC Continuous (A)=0.5, Mounting Technology="Surface Mount", PackageDescription="3-Pin Small Outline Transistor, Body 2.92 x 1.3 mm, Pitch 0.95 mm", PackageReference=SOT-23-3-318-08, PackageVersion="Rev. AP, 11/2009", Packing="Tape and Reel", PartNumber=MMBTA06LT1G, Polarity=NPN, RoHS=TRUE
R1 R2: library part CMP-2001-04896-1, Manufacturer="Vishay Dale", Part Number=CRCW08050000Z0EA
R3 R4 R5 R6 R7 R8 R9 R10 R11 R12 R13 R14 R15 R16 R17 R18 R19 R20 R21 R22 R23 R24 R25: library part CMP-009-00010-4, "Chip Resistor, 1 KOhm, +/- 1%, 0.125 W, -55 to 155 degC, 0805 (2013 Metric)", Case/Package=0805, Max Operating Temperature=155°C, Min Operating Temperature=-55°C, Power=125mW, Tolerance=1%, Voltage Rating=150V, Mounting Technology=SM, Pins=2, RoHS Compliant=True
SW1 SW2 SW3: library part CMP-2000-05514-2, "SWITCH TACTILE SPST-NO 0.05A 24V / LCSC Part # C86476", Contact Current Rating=50mA, Contact Resistance=100mΩ, Manufacturer="TE Connectivity", Operating Force=160gf, Temperature="-35°C to +85°C", Temperature Range High=+85°C, Temperature Range Low=-35°C, Voltage Rating Dc=24V, Automotive=No, Category=Switch, ComponentLink2Description=Datasheet, ComponentLink2URL=https://www.te.com/commerce/DocumentDelivery/DDEController?Action=showdoc&DocId=Customer+Drawing%7F1825027%7FG4%7Fpdf%7FEnglish%7FENG_CD_1825027_G4.pdf%7F1825027-5, Device Class L1=Electromechanical, Device Class L2=Switches, Device Class L3="Pushbutton Switches", Digikey Description="SWITCH TACTILE SPST-NO 0.05A 24V", Electromechanical Life=100000Cycles, Height=7.31mm, Lead Free=Yes, Manufacturer Part Number=1825027-5, Mount="Through Hole", Mouser Description="Tactile Switches R/A TACT 160G PB SWITCH", Octopart=https://octopart.com/1825027-5-te+connectivity-46510878, Package=1825027-5, RoHS=TRUE, Throw Configuration=SPST-NO
U1: library part CMP-0365-00585-2, "16 MHz Mixed Signal Microcontroller with 16 KB Flash, 512 B SRAM and 24 GPIOs, -40 to 85 degC, 20-pin SOP (PW), Green (RoHS & no Sb/Br) / LCSC Part # C53923", Frequency(MHz)=16, Manufacturer="Texas Instruments", Temp Sensor=Yes, ADC="10-bit SAR", ADC Channels=8, Brown Out Reset=Yes, Cap touch I/O=Yes, Code_JEDEC=MO-153, Comparators=Yes, ComponentLink1Description="Manufacturer URL", ComponentLink1URL=http://www.ti.com/, ComponentLink2Description=Datasheet, ComponentLink2URL=http://www.ti.com/general/docs/lit/getliterature.tsp?genericPartNumber=MSP430G2553&fileType=pdf, ComponentLink3Description="Package Specification", ComponentLink3URL=http://www.ti.com.cn/cn/lit/ml/mpds362/mpds362.pdf, DatasheetVersion=SLAS735G, Eco-Plan="Green (RoHS & no Sb/Br)", Flash(KB)=16, GPIO=24, Mounting Technology="Surface Mount", PackageDescription="20-Pin Plastic Small Outline, Body 6.5 x 4.4 mm, 0.65 mm Pitch", PackageReference=PW0020A, PackageVersion=4040064-5/G, PartNumber=MSP430G2553IPW20, SRAM(B)=512, SubFamily="Value Line", Timers - 16-bit=2, USCI_A (UART/LIN/IrDA/SPI)=1, USCI_B (I2C & SPI)=1, Watchdog=Yes
U2: library part CMP-0062-01784-3, "Series 3-Terminal Positive Regulators, 4-pin SOT-223, Pb-Free / LCSC Part # C131990", Manufacturer="Texas Instruments", PackageTopMarking=XYTT*N00A, PowerWise=N, Code_IPC=SOT223-4, Code_JEDEC=TO-261-AA, ComponentLink1Description="Datasheet URL", ComponentLink1URL=http://www.ti.com/general/docs/lit/getliterature.tsp?genericPartNumber=LM340-N&fileType=pdf, CompType="LDO IC", PackageDescription="Molded SOT-223, 6.50 x 3.56 x 1.6mm Body, 4 Lead, 2.3mm Pitch", PackageReference=DCY0004A, PinCount=4, RoHS=Y
U3: library part CMP-04918-000055-1, "IC REG BOOST ADJ SOT23-6 / WON'T BE POPULATED BY MANUFACTURER", Manufacturer="Texas Instruments", Max Junction Temp=+125°C, Max Supply Voltage=5.5V, Min Supply Voltage=1.8V, Nominal Supply Current=110uA, Output Current=980mA, Output Voltage=3.3-28V, Package=DBV0006A, Switching Frequency=1050kHz, Temperature="-40°C to +125°C", Temperature Range Low=-40°C, Automotive=No, Category=IC, ComponentLink2Description=Datasheet, ComponentLink2URL=http://www.ti.com/lit/ds/symlink/tlv61046a.pdf, Device Class L1="Integrated Circuits (ICs)", Device Class L2="Power Management ICs", Device Class L3="Voltage Regulators - Switching", Digikey Description="IC REG BOOST ADJ SOT23-6", Height=1.45mm, Ipc Land Pattern Name=SOT95P280X145-6, Lead Free=Yes, Manufacturer Part Number=TLV61046ADBVT, Max Duty Cycle=90%, Number Of Outputs=1, Octopart=https://octopart.com/tlv61046adbvt-texas+instruments-81856327, Output Type=AdjustableProgrammable, RoHS=TRUE, Standoff Height=0mm, Switching Topology=Boost, Temperature Range High=+125°C
U4: "Integrated Circuit / LCSC Part # C78978", Manufacturer_Name="Texas Instruments", Mouser Part Number=595-BQ21040DBVT, Arrow Part Number=BQ21040DBVT, Arrow Price/Stock=https://www.arrow.com/en/products/bq21040dbvt/texas-instruments, Datasheet Link=http://www.ti.com/lit/gpn/bq21040, Height=1.45mm, Manufacturer_Part_Number=BQ21040DBVT, Mouser Price/Stock=https://www.mouser.co.uk/ProductDetail/Texas-Instruments/BQ21040DBVT/?qs=cttFivMKqWxXmJjs8S2Pcw%3D%3D
U5: library part CMP-04911-000008-1, "IC BATT FUEL GAUGE LI-ION 12SON / WON'T BE POPULATED BY MANUFACTURER", Ambient Temperature Range High=+85°C, Ambient Temperature Range Low=-40°C, Manufacturer="Texas Instruments", Max Supply Voltage=4.5V, Min Supply Voltage=2.45V, Nominal Supply Current=93uA, Output Voltage=1.8V, Package=DRZ0012A, Temperature="-40°C to +85°C", Automotive=No, Category=IC, ComponentLink2Description=Datasheet, ComponentLink2URL=http://www.ti.com/lit/gpn/bq27441-g1, Device Class L1="Integrated Circuits (ICs)", Device Class L2="Power Management ICs", Device Class L3="Battery Management", Digikey Description="IC BATT FUEL GAUGE LI-ION 12SON", Height=1mm, Lead Free=Yes, Manufacturer Part Number=BQ27441DRZR-G1A, Mouser Description="System-Side Impedance Track? Battery Fuel (Gas) Gauge 12-SON -40 to 85", Number Of Cells=1, Number Of Outputs=1, Octopart=https://octopart.com/bq27441drzr-g1a-texas+instruments-30555829, RoHS=TRUE, Standoff Height=0mm, Temperature Range High=+85°C, Temperature Range Low=-40°C

## Via types
v1: diameter 50, hole 28, Top Layer to Bottom Layer, 34 vias
v2: diameter 23.62, hole 11.81, Top Layer to Bottom Layer, 6 vias
v3: diameter 177.17, hole 177.17, Top Layer to Bottom Layer, 4 vias

## Nets (pads, with @x,y where several pads share a name; then routed paths per layer and width w, separated by ;. In a path a pad name is that pad's centre, name@x,y a point inside that pad or via, vN(x,y) a via of type N, cw(c..) or ccw(c..) an arc to the next point about the centre after c; other vN are vias at no path point)
+3.3V: C4.1 C5.1 U2.3 | length 265.5
  Top Layer w10: C4.1 1611.42,707.17 C5.1 1702.72,704.45 U2.3 1790,703.39 v1(1790,620)
+3V3: C1.1 C2.1 L2.1 P1.1 R1.2 R6.2 R7.2 R8.2 R15.1 R17.1 R19.1 R23.1 U1.1 | length 1059.4
  Top Layer w10: v1(65,1150) 65,1036.61 R23.1 ; R19.1 301.77,1760 v1(380,1760) ; v1(435,1465) 469.96,1499.96 R1.2 ; v1(530,1840) 530,1928.39 R17.1 ; v1(860,2030) 891.61,2061.61 R15.1 ; v1(1085,220) C1.1 1279.53,220 C2.1 ; U1.1 1217.2,1413.62 1235,1395.82 v1(1235,1385) ; v1(1455,1190) 1455,1265 R7.2 ; R6.2 1683.39,1381.97 1751.42,1450 v1(1755,1450) ; v1(1990,1390) 1990,1316.61 1995,1311.61 R8.2
+5V: J1.1 U4.6 | length 1747.3
  Top Layer w10: U4.6 1235.79,1814.21 v1(1310,1740) ; v1(1395,565) 1395,515 1490.04,419.96 1490.04,280.71 J1.1
  Bottom Layer w10: v1(1310,1740) 1317.65,1732.35 1317.65,1716.49 1320,1714.14 1320,1470 1395,1395 v1(1395,565)
+12V: C8.2 D3.1 P4.2 R3.2 U3.5 | length 621
  Top Layer w10: R3.2 C8.2 C8.2@898.58,600 ; U3.5 860,705 898.58,666.42 C8.2@898.58,600 ; D3.1 1091.18,785.24 1120,756.42 P4.2 ; P4.2@1115,715 1035,635 939.72,635 904.72,600 C8.2@898.58,600
+BATT: C10.1 P3.2 R12.1 U5.6 U5.8 | length 3110.6
  Top Layer w10: v1(150,500) 150,324.21 P3.2 ; U5.6@1632.49,1215.38 1644.85,1203.02 1644.85,1191.4 1771.25,1065 1946.65,1065 2017.13,1135.47 2020,1135.47 C10.1 ; U5.8 1902.01,1231.38 R12.1 1921.97,1213.39 1986.18,1149.17 2011.3,1149.17 C10.1 ; v1@2020,1075 2020,1130.47 C10.1
  Bottom Layer w10: v1(150,500) 1455,500 v1(2020,1065)
CHG: D1.2 U4.3 | length 294.6
  Top Layer w10: U4.3 1372.4,1997.4 1405,2030 1405,2141.34 D1.2
"CTL FAN": P1.5 R13.2 R14.2 U1.2 | length 737.2
  Top Layer w10: P1.5 945,1335 1110,1335 1130.22,1314.78 1130.22,1301.55 R14.2 R13.2 1257.69,1297.69 1257.69,1317.69 1295,1355 1295,1440 1254.57,1480.43 U1.2
GND: C1.2 C2.2 C3.2 C4.2 C5.2 C6.2 C7.2 C8.1 C9.2 C10.2 C11.2 C12.2 C13.2 D2.2 D4.2 D5.2 D6.2 J1.5 P1.2 P3.1 Q1.3 Q2.2 R2.1 R4.1 R10.2 R11.2 R14.1 R16.2 R18.2 R20.2 U1.20 U2.2 U2.4 U3.2 U4.5 U5.3 | length 161.2
  Top Layer w10: C9.2@1555,1145 1555,1206.11 1610.96,1262.06 1631.52,1262.06 U5.3@1631.83,1262.37
GPBATT: R8.1 U5.12 | length 126.6
  Top Layer w10: U5.12 1899.37,1294.37 R8.1@1910,1305
"I2C SCL": P2.4 R7.1 U1.9 U5.2 | length 1428
  Top Layer w10: U1.9 1250.43,1659.57 1275,1635 v1(1515,1635) ; v1(1490,1375) 1495.89,1369.11 1495.89,1340.89 R7.1 1593.35,1285 1599.72,1278.62 1615.51,1278.62 1615.76,1278.37 1631.58,1278.37 U5.2 ; P2.4@2017.5,1597.5 P2.4
  Bottom Layer w10: v1(1490,1375) 1490,1575 1515,1600 1515,1695 1565,1745 1635,1745 1782.5,1597.5 P2.4@2020.79,1597.5
"I2C SDA": P2.5 R6.1 U1.10 U5.1 | length 1314.9
  Top Layer w10: U1.10 1217.36,1685 v1(1590,1685) ; v1(1605,1460) R6.1@1605,1383.58 ; U5.1@1631.58,1294.62 1606.61,1319.59 R6.1 1606.61,1381.97 R6.1@1605,1383.58 ; P2.5@2017.5,1497.5 P2.5 ; R6.1@1605,1383.58 1605,1370 1571.46,1403.54 1585.04,1403.54 R6.1@1605,1383.58
  Bottom Layer w10: v1(1590,1685) 1590,1490 1594.22,1485.78 1594.22,1481.61 1605,1470.82 v1(1605,1460) 1642.5,1497.5 P2.5@2017.5,1497.5
NetC9_1: C9.1 U5.5 | length 128.3
  Top Layer w10: C9.1@1620,1145 1590,1175 1590,1209.61 1611.77,1231.38 U5.5
NetD1_1: D1.1 R5.1 | length 123.6
  Top Layer w10: R5.1 1455,2055.14 1475,2075.14 D1.1
NetD2_1: D2.1 R9.1 | length 119
  Top Layer w10: D2.1 1550,2016.77 R9.1@1555,2011.77
NetD3_2: D3.2 P4.1 Q1.2 Q1.4 | length 524
  Top Layer w10: Q1.2 Q1.4 1205.59,908.11 1238.82,874.88 D3.2 1220,781.18 P4.1
NetD4_1: D4.1 R21.1 | length 149.6
  Top Layer w10: D4.1 1775,2091.42 1853.03,2013.39 R21.1
NetD5_1: D5.1 R22.1 | length 139.2
  Top Layer w10: D5.1 1700,2066.42 1753.03,2013.39 R22.1
NetD6_1: D6.1 R25.1 | length 128.9
  Top Layer w10: D6.1 1625,2041.42 1653.03,2013.39 R25.1
NetL1_2: L1.2 U3.1 | length 184.3
  Top Layer w10: L1.2@694.29,905.71 L1.2@694.29,910 ; 695,770.84 695,905.71 L1.2 ; 699.29,766.79 719.98,746.1 U3.1@729.82,746.1
NetL2_2: L2.2 Q2.3 R23.2 | length 342.9
  Top Layer w10: L2.2 121.81,798.62 121.81,1013.43 R23.2 143.38,1036.97 166.41,1060 Q2.3
NetQ1_1: Q1.1 R13.1 | length 128
  Top Layer w10: Q1.1 1270.55,1191.57 1283.27,1204.29 1284.61,1204.29 1316.77,1236.46 R13.1
NetQ2_1: Q2.1 R24.2 | length 85.7
  Top Layer w10: Q2.1 375.98,1022.6 R24.2
NetR3_1: R3.1 R4.2 U3.3 | length 174.4
  Top Layer w10: R4.2 664.69,671.3 729.82,671.3 729.82,601.8 R3.1
NetR10_1: R10.1 U4.4 | length 139
  Top Layer w10: R10.1 1160,1921.61 1160,1960 1197.17,1997.17 1235.55,1997.17 U4.4
NetR11_1: R11.1 U4.1 | length 111.7
  Top Layer w10: U4.1 1334.21,1860.98 1368.23,1826.97 R11.1
NetR16_1: R16.1 SW1.1 | length 470
  Top Layer w10: R16.1@955,1978.39 996.61,2020 1130,2020 1290,2180 1290,2219.37 SW1.1
NetR18_1: R18.1 SW2.1 | length 260
  Top Layer w10: SW2.1 683.58,2183.58 660,2160 660,2043.58 701.61,2001.97 R18.1
NetR20_1: R20.1 SW3.1 | length 358
  Top Layer w10: SW3.1 288.58,2183.58 265,2160 265,2076.77 376.46,1965.32 376.46,1963.35 398.03,1941.77 R20.1
P1.1: P2.1 R21.2 U1.3 | length 1183.9
  Top Layer w10: U1.3 1741.02,1506.02 1855,1620 R21.2 1978.39,1936.61 P2.1
P1.2: P5.1 U1.4 | length 1348.2
  Top Layer w10: v1(1150,1385) 1150,1484.72 1190.18,1524.9 1194.74,1524.9 1201.46,1531.61 U1.4
  Bottom Layer w10: P5.1 105,1650 605,1650 835,1420 987.09,1420 1022.09,1385 v1(1150,1385)
P1.3: P2.2 R22.2 U1.5 | length 1182.3
  Top Layer w10: U1.5 1702.2,1557.2 1755,1610 1755,1875 ; R22.2 1755,1875 ; v1(1805,1830) 1800,1830 1755,1875
  Bottom Layer w10: v1(1805,1830) 1835,1800 P2.2@2020,1800
P1.4: P2.3 R25.2 U1.6 | length 1193.8
  Top Layer w10: U1.6 1597.8,1582.8 1655,1640 1655,1855 ; R25.2 1655,1855 ; v1(1705,1805) 1655,1855
  Bottom Layer w10: v1(1705,1805) 1815,1695 P2.3@2024.44,1695
P1.5: C11.1 R15.2 SW1.2 U1.7 | length 1026.6
  Top Layer w10: SW1.2 987.95,2227.95 C11.1 980,2131.61 R15.2 968.39,2058.39 900,1990 900,1850 935,1815 1075,1815 1160,1730 1160,1625 1176.61,1608.39 U1.7
P1.6: P5.2 U1.14 | length 914.9
  Top Layer w10: v1(580,1590) 587.47,1590 605.86,1608.39 U1.14
  Bottom Layer w10: P5.2 109.67,1555 144.67,1590 v1(580,1590)
P2.3: C13.1 R19.2 SW3.2 U1.11 | length 1370.4
  Top Layer w10: SW3.2 115,2229.37 115,1820 C13.1 176.97,1810 220,1766.97 R19.2 220,1763.03 297.87,1685.16 U1.11
P2.4: P5.3 U1.12 | length 977.5
  Top Layer w10: P5.3 255,1455 459.57,1659.57 U1.12
P2.5: P5.4 U1.13 | length 1013.3
  Top Layer w10: P5.4 230,1355 515,1640 971.02,1640 977.05,1633.98 U1.13
P2.6: P5.5 R24.1 U1.19 | length 1267.7
  Top Layer w10: P5.5 225,1255 355.04,1124.96 358.43,1124.96 R24.1 381.61,1105 v1(475,1105) ; v1(900,1365) 900,1425 952.56,1477.56 989.92,1477.56 U1.19
  Bottom Layer w10: v1(475,1105) 535,1165 885,1165 915,1195 915,1339.18 900,1354.18 v1(900,1365)
P2.7: C12.1 R17.2 SW2.2 U1.18 | length 1106.9
  Top Layer w10: SW2.2 507.38,2231.99 507.38,2102.62 610,2000 610,1931.61 R17.2 608.39,1928.03 631.42,1905 C12.1 720,1904.53 v1(720,1810) ; v1(855,1475) 886.02,1506.02 U1.18
  Bottom Layer w10: v1(720,1810) 855,1675 v1(855,1475)
TDIO: C3.1 P1.4 R1.1 U1.16 | length 994.7
  Top Layer w10: v1@465,1385 515,1435 R1.1 609.53,1435 620.24,1445.72 650.72,1445.72 762.2,1557.2 U1.16
  Bottom Layer w10: v1(450,1375) 515,1310 728.81,1310 750,1288.81 P1.4 P1.4@750,1228.91
TEST: P1.3 R2.2 U1.17 | length 571.6
  Top Layer w10: P1.3 635,1255 635,1362.48 R2.2 635.84,1378.35 653.35,1378.35 750,1475 806.61,1531.61 U1.17
VSYS: C6.1 C7.1 L1.1 R5.2 R9.2 R12.2 U2.1 U3.6 U4.2 U5.7 | length 3557.1
  Top Layer w10: U3.6@830,742.4 L1.1@830,879.29 ; L1.1@855.71,953.19 855.71,965 856.42,965.71 C7.1@856.42,1100 ; L1.1@860.71,898.19 893.11,865.79 929.21,865.79 v1(980,815) ; v1(1315,600) 1558.58,843.58 C6.1@1681.42,843.58 ; U4.2 1429.65,1960 1453.03,1936.61 R5.2 1553.39,1936.61 R9.2@1555,1935 ; v1(1425,1440) 1425,1433.43 1400,1408.43 1400,1125 1667.72,857.28 1677.44,857.28 1681.42,853.31 C6.1@1681.42,843.58 ; v1(1430,1740) 1485,1740 1555,1810 R9.2@1555,1935 ; R9.2 R9.2@1555,1935 ; U5.7@1788.42,1215.38 1804.49,1215.38 1804.87,1215 1839.65,1215 1918.03,1136.61 R12.2 1908.39,1125 v1(1830,1125) ; v1(1800,985) 1800,896.61 U2.1 1778.11,885.55 1765.39,872.83 1765.39,866.42 1742.56,843.58 C6.1 C6.1@1681.42,843.58
  Bottom Layer w10: v1(980,815) 980,745 1125,600 v1(1315,600) ; v1(1425,1440) 1427.5,1442.5 1427.5,1737.5 v1(1430,1740) ; v1(1800,985) 1800,1026.57 1830,1056.57 v1(1830,1125)
pads on no net: J1.2 J1.3 J1.4 J1.MH1 J1.MH2 J1.MP1 J1.MP2 J1.MP3 J1.MP4 P3.MP1 P3.MP2 SW1.3 SW1.4 SW2.3 SW2.4 SW3.3 SW3.4 U1.8 U1.15 U3.4 U5.4 U5.9 U5.10 U5.11 U5.13
copper on no net:
  other v2: 1674.57,1235.32 1710,1235.32 1745.43,1235.32 1674.57,1274.68 1710,1274.68 1745.43,1274.68
  other v3: 495,235 1889.76,267.48 236.22,1921.02 1945,2150

## Polygon pours and split planes (outlines as drawn)
+3V3 on Bottom Layer "+3V3_L02_P000" (solid, pour order 0): 0,2280 2085,2280 2085,110 0,110
GND on Top Layer "GND_L01_P001" (solid, pour order 1): 0,110 2085,110 2085,2280 0,2280